# Altium PCB SAW-TOOTH-DAC0808.PcbDoc
Units mm, origin at the board's own origin, x right, y up, seen from the top; angles counter-clockwise.
Board outline 119.51 x 37.72 mm, 2 copper layers (Top Layer, Bottom Layer); 20 components, 23 nets, 91 pads, 12 vias.
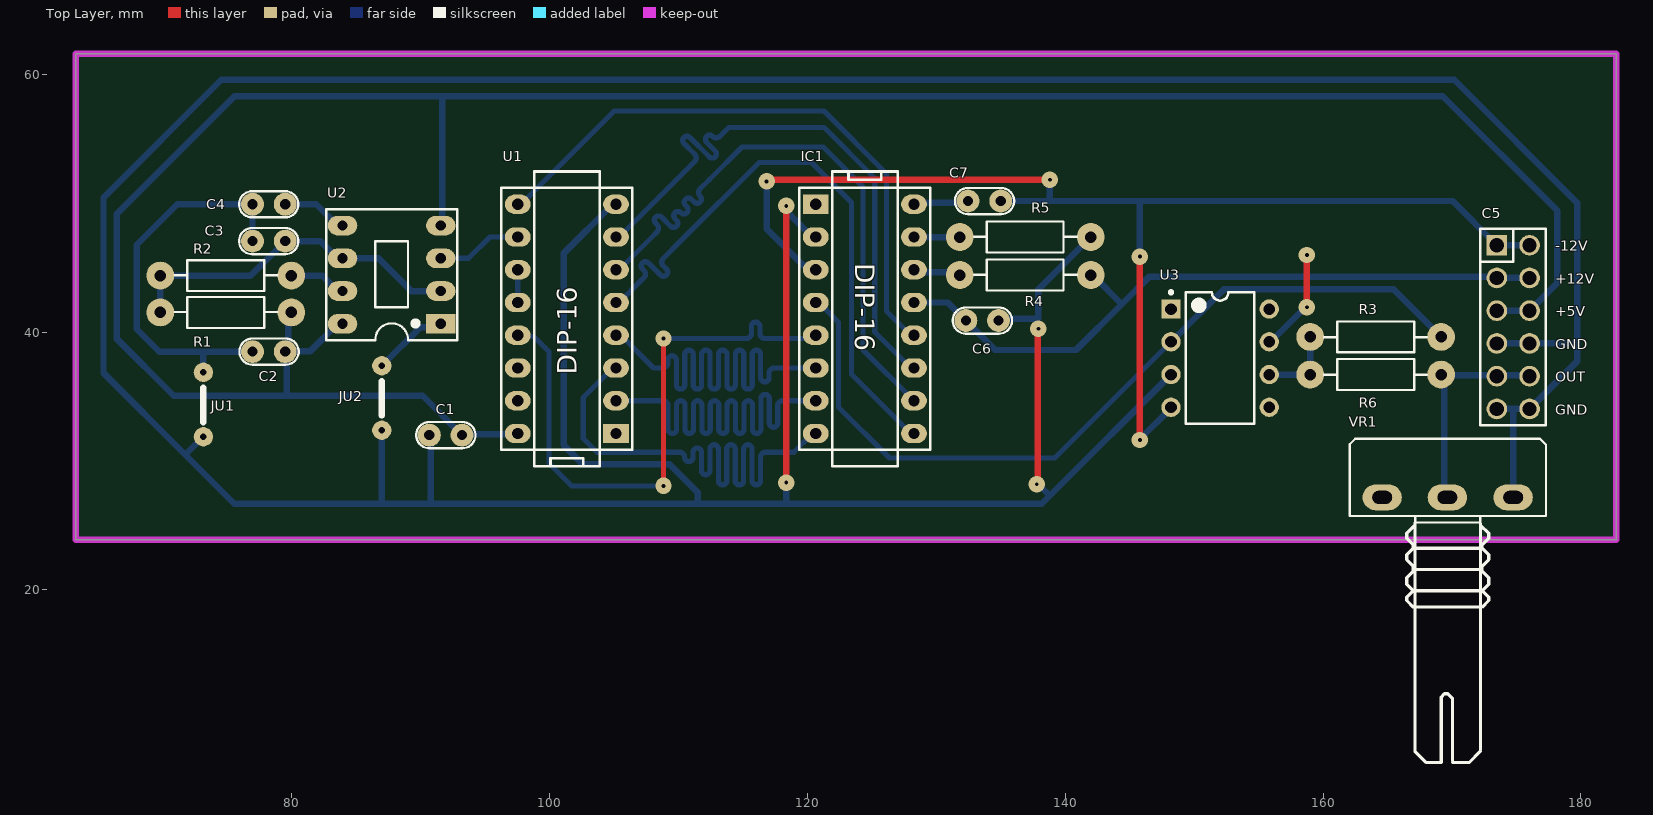
[diagram p0: Top Layer view]
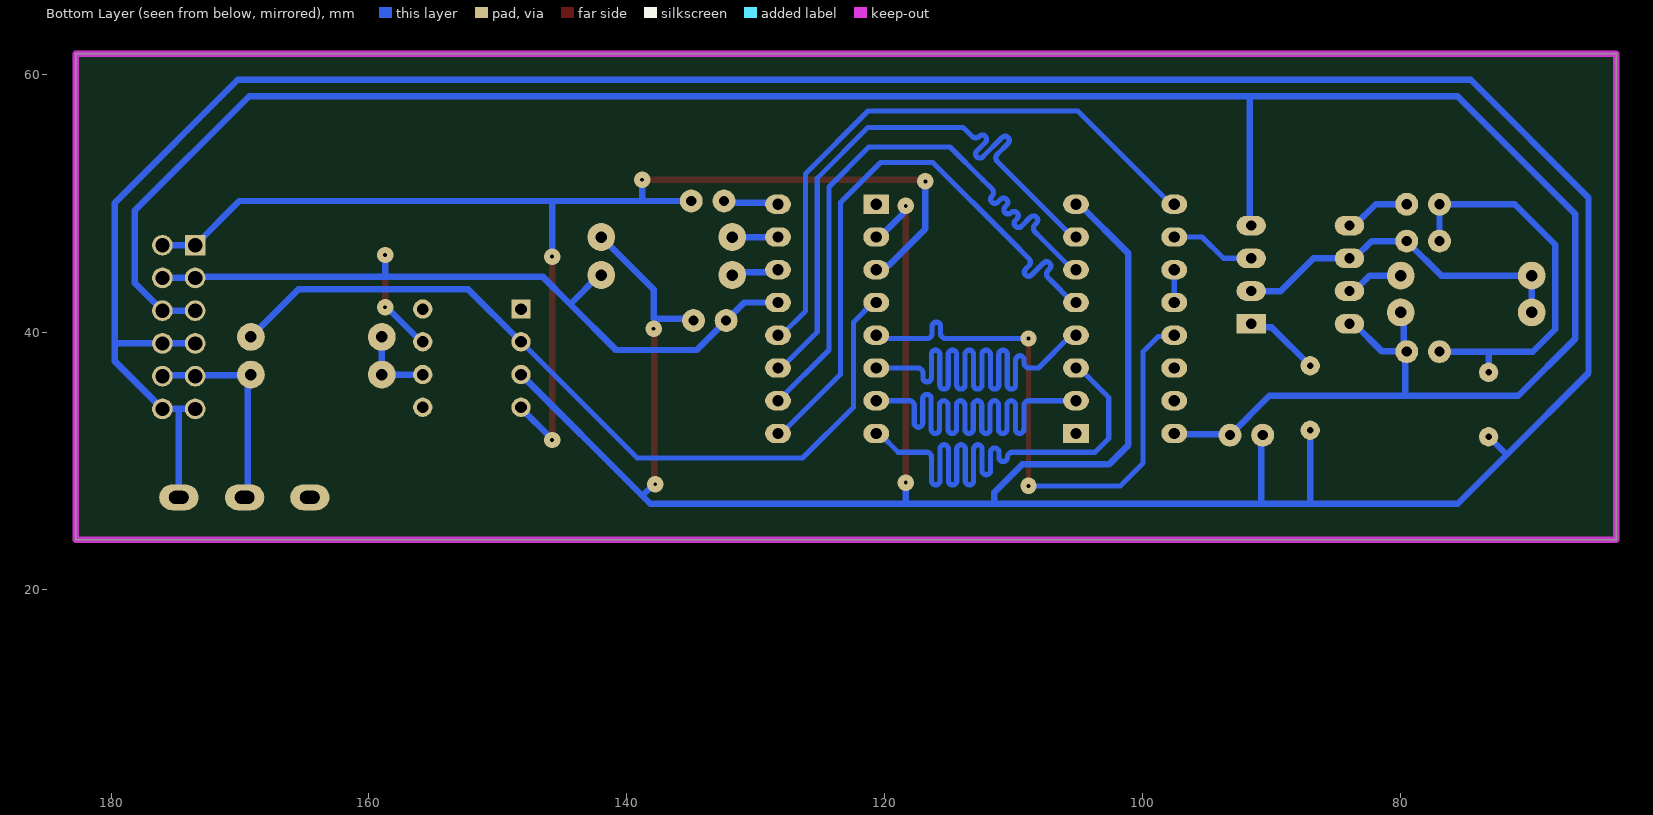
[diagram p1: Bottom Layer view, seen from below]
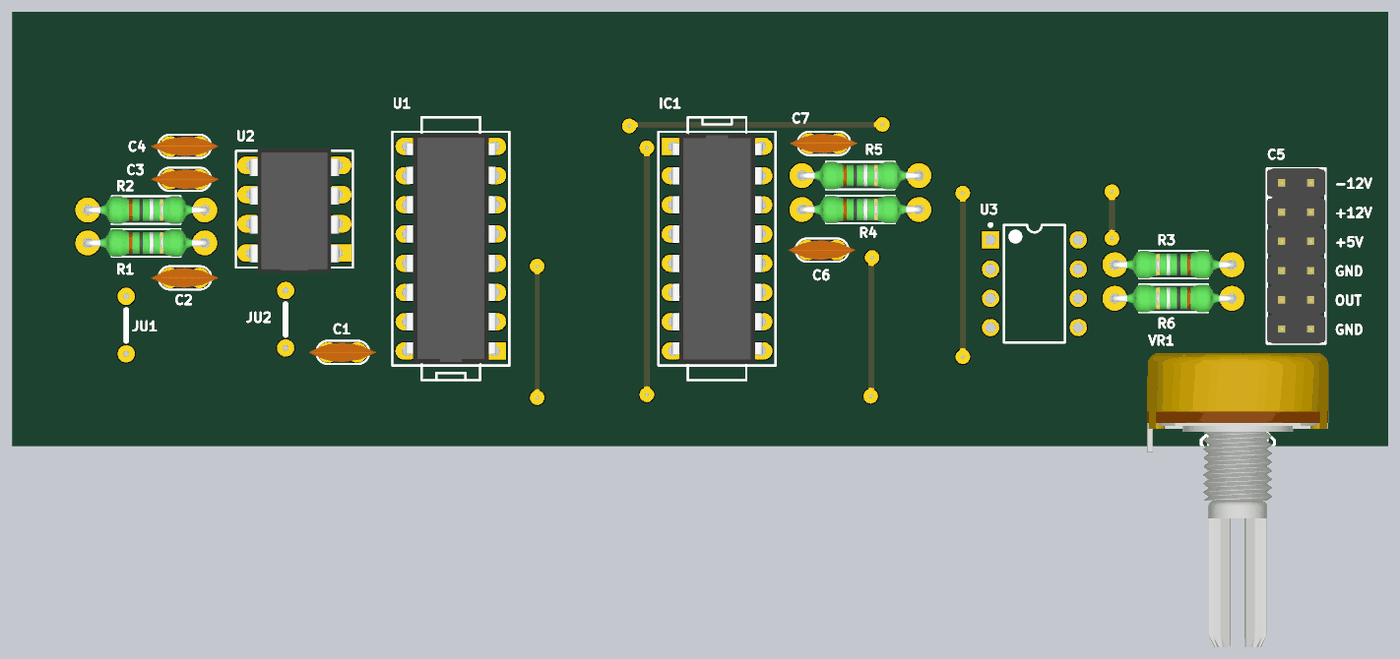
[diagram p2: 3D render of the assembled board from above, using the file's embedded part models]

## Layer stack, top to bottom
Top Solder: solder mask 0.0102, Solder Resist, Dk 3.5
Top Layer: signal copper 0.0356
Dielectric 1: dielectric 0.32, FR-4, Dk 4.8
Bottom Layer: signal copper 0.0356
Bottom Solder: solder mask 0.0102, Solder Resist, Dk 3.5

## Board outline
63.246,23.876 63.246,61.595 182.753,61.595 182.753,23.876

## Design rules (kind name [scope] priority, off if disabled: settings)
Clearance [All] p1: gap=0.5 ignorepadtopadclearanceinfootprint=FALSE
MatchedLengths "Schematic Matched Net Lengths" [InNetClass('BIT')] p1: tolerance=0.2 checknetsindiffpair=FALSE checkdiffpairvsdiffpair=TRUE checkxsignals=TRUE checkothers=TRUE
PolygonConnect [All] p1: connectstyle=Relief reliefconductorwidth=0.254 reliefentries=4 polygonreliefangle="90 Angle" airgapwidth=0.254
RoutingVias [All] p1: holewidth=0.3 width=1.27 viastyle="Through Hole" minholewidth=0.3 minwidth=1.27 maxholewidth=0.3 maxwidth=1.27
SolderMaskExpansion [All] p1: expansion=0.102 istentingtop=FALSE
Width [All] p1: maxlimit=1 minlimit=0.4 preferedwidth=0.5
30 further rules are at their usual default settings.

## Classes and differential pairs
net class BIT: BIT0 BIT1 BIT2 BIT3 BIT4 BIT5 BIT6 BIT7

## Components (designator, comment, footprint, x,y, rotation, side; value= is the part's Value field where it differs from the comment)
C1 "100nF" CN1 91.948,32.004 r0 top value=33pF
C2 "100nF" CN1 78.235,38.481 r0 top value=33pF
C3 "1nF" CN1 78.232,47.053 r180 top value=33pF
C4 "100nF" CN1 78.232,49.911 r180 top value=33pF
C5 "JP6x2" JP6-D2T 174.752,40.386 r270 top
C6 "100nF" CN1 133.566,40.894 r0 top value=33pF
C7 "100nF" CN1 133.731,50.165 r0 top value=33pF
IC1 "DAC0808" DIP16 124.462,41.014 r270 top
JU1 "JUMPER 5MM" "JUMPER 5MM" 73.152,31.877 r90 top
JU2 "JUMPER 5MM" "JUMPER 5MM" 86.995,32.385 r90 top
R1 "1K2" RES-1/4W 74.511,41.65 r180 top
R2 "2K2" RES-1/4W 74.511,44.507 r180 top
R3 "5K1" RES-1/4W 164.465,39.497 r0 top
R4 "5K1" RES-1/4W 136.525,44.55 r180 top
R5 "1K" RES-1/4W 136.525,47.498 r180 top
R6 "1K" RES-1/4W 164.465,36.576 r0 top
U1 "4040" DIP16 101.344,41.028 r90 top
U2 "NE555" DIP8 87.757,44.323 r90 top
U3 "TL071CP" P0008A 152.019,37.973 r0 top
VR1 "10K" VR-S1 169.672,27.178 r0 top value="Volume 50k"

## Footprints (in the part's own frame and the unit in brackets; to place one, negate y for a bottom-side part, rotate by r counter-clockwise, add the part's x,y. Pads: shape width x height; smd on the part's side, far side on the other; paste and mask are expansions set on the pad)
CN1 [mil]
  round 70 hole 31: 1(-50,0) 2(50,0)
  silkscreen extent -90,-40 91,40, body extent -115,-33 115,33, height 265
DIP8 [mil] "DIP, 8-Leads, Row Spacing 7.62mm, Pitch 2.54mm, Body 9.91x6.73mm"
  rect 60x90 hole 31: 1(-145,-150)
  oval 60x90 hole 31: 2(-45,-150) 3(55,-150) 4(155,-150) 5(155,150) 6(55,150) 7(-45,150) 8(-145,150)
  silkscreen extent -195,-200 205,200, body extent -213,-153 213,153, height 177
DIP16 [mm]
  rect 1.5x2 hole 0.864: 1(-8.897,-3.812)
  oval 1.5x2 hole 0.864: 2(-6.357,-3.812) 3(-3.817,-3.812) 4(-1.277,-3.812) 5(1.263,-3.812) 6(3.803,-3.812) 7(6.343,-3.812) 8(8.883,-3.812) 9(8.883,3.808) 10(6.343,3.808) 11(3.803,3.808) 12(1.263,3.808) 13(-1.277,3.808) 14(-3.817,3.808) 15(-6.357,3.808) 16(-8.897,3.808)
  silkscreen extent -11.44,-5.08 11.42,5.08, body extent -10,-3.93 10,3.94, height 1.99
JP6-D2T [mm] "12 pins, dual pin, straight, gold plating"
  rect 1.6x1.6 hole 1.1: 1(-6.35,-1.27)
  round 1.6 hole 1.1: 2(-3.81,-1.27) 3(-1.27,-1.27) 4(1.27,-1.27) 5(3.81,-1.27) 6(6.35,-1.27) 7(6.35,1.27) 8(3.81,1.27) 9(1.27,1.27) 10(-1.27,1.27) 11(-3.81,1.27) 12(-6.35,1.27)
  silkscreen extent -7.62,-2.54 7.62,2.54, body extent -7.62,-2.54 7.62,2.54, height 8.55
"JUMPER 5MM" [mm]
  round 1.5 hole 0.5: 1(0,0) 2(5,0)
  silkscreen extent 1.14,0 3.81,0
P0008A [mm] "DIP, 8-Leads, Body 10.15x6.6mm, Pitch 2.54mm"
  rect 1.5x1.5 hole 0.9: 1(-3.81,3.81)
  round 1.5 hole 0.9: 2(-3.81,1.27) 3(-3.81,-1.27) 4(-3.81,-3.81) 5(3.81,-3.81) 6(3.81,-1.27) 7(3.81,1.27) 8(3.81,3.81)
  silkscreen extent -3.93,-5.1 2.65,5.23, body extent -3.95,-5.07 3.95,5.07, height 5.08
RES-1/4W [mil]
  round 85 hole 35: 1(-215,5) 2(185,5)
  silkscreen extent -173,-42 141,52, body extent -227,-42 197,52, height 95
VR-S1 [mil]
  oval 120x78.74 hole 40 slot 60 at 0 deg: 1(-200,0) 2(-1,0) 3(200,0)
  silkscreen extent -299,-810 300,179, body extent -310,-818 310,188, height 839

## Part data
C1 C2 C3 C4 C6 C7: library part CN
C5: "WR-PHD 2.54 mm Dual Socket Header", Manufacturer="W¨¹rth Elektronik eiSos GmbH", partNo=61301221821, ComponentLink1 Description=Manufacturer, ComponentLink1URL=http://www.we-online.com, ComponentLink2 Description=Datasheet, ComponentLink2URL=http://katalog.we-online.de/em/datasheet/6130xx21821.pdf, Created by="Karrer Zheng", Created Date="29 March 2013", NoPins=12
IC1: "8 Bits Digital Analog Convert"
R1 R2 R3 R4 R5 R6: library part Res, "Res", Manufacturer="Generic Components", Class=Passive, Published=08/06/2000, Publisher="Altium Hobart Technology Centre", SubClass=R
U1: "ASYNCHRONOUS 12-BIT BINARY COUNTERS"
U2: "TIMER IC", Current=200mA, Frequency=500kHz, Manufacturer=STMicroelectronics, Manufacturer Part Number=NE555DT, Operating Temperature="0°C ~ 70°C", Package / Case="8-SOIC (3.9mm Width)", Supplier Part Number=497-1962-2-ND, Voltage - Supply="4.5 V ~ 16 V", Category="Integrated Circuits (ICs)", Count=-, Packaging="Tape & Reel (TR)", RoHS="RoHS Compliant", Supplier=Digi-Key, Supplier 1=Digi-Key, Supplier Part Number 1=497-1962-2-ND, Type="555 Type, Timer/Oscillator (Single)"
U3: library part CMP-0017-00972-2, "Low-Noise JFET-Input General-Purpose Operational Amplifier, 7 to 36 V, 0 to 70 degC, 8-pin DIP (P8), Pb-Free (RoHS)", Manufacturer="Texas Instruments", Rating=Military, Total Supply Voltage(Max)(+5V is 5, +/-5V is 10)=36, Total Supply Voltage(Min)(+5V is 5, +/-5V is 10)=7, CMRR(Min)(dB)=70, Code_JEDEC=MS-001, ComponentLink1Description="Manufacturer URL", ComponentLink1URL=http://www.ti.com/, ComponentLink2Description=Datasheet, ComponentLink2URL=http://www.ti.com/lit/ds/symlink/tl071.pdf, ComponentLink3Description="Package Specification", ComponentLink3URL=http://www.ti.com/litv/pdf/mpdi001b, DatasheetVersion=SLOS080J, Eco-Plan="Pb-Free (RoHS)", GBW(Typ)(MHz)=3, IIB(Max)(pA)=200, Iq per channel(Max)(mA)=2.5, Mounting Technology="Through Hole", Number of Channels=1, Offset Drift(Typ)(uV/C)=18, PackageDescription="8-Pin Plastic In-Line, Body 9.59 x 6.35 mm, Pitch 2.54 mm", PackageReference=P0008A, PackageVersion="4040082/E, 04/2010", PartNumber=TL071CP, Slew Rate(Typ)(V/us)=13, Sub Family="General Purpose Amplifier, High Supply Voltage Amplifier (>=30V)", Vio (25C)(Max)(mV)=10, Vn at 1kHz(Typ)(nV/rtHz)=18
VR1: library part VR-S, "Var Resistor"

## Via types
v1: diameter 1.27, hole 0.3, Top Layer to Bottom Layer, 12 vias

## Nets (pads, with @x,y where several pads share a name; then routed paths per layer and width w, separated by ;. In a path a pad name is that pad's centre, name@x,y a point inside that pad or via, vN(x,y) a via of type N, cw(c..) or ccw(c..) an arc to the next point about the centre after c; other vN are vias at no path point)
5V: C1.2 C2.2 C5.3 C5.10 R1.1 U1.16 U2.4 U2.8 | length 196.5
  Bottom Layer w0.5: R1.1 79.738,41.289 79.738,38.714 C2.2@79.519,38.495 ; U2.8 83.566,40.64 81.421,38.495 79.738,38.495 C2.2@79.519,38.495 ; U2.4 91.694,48.387 91.694,58.293 ; U1.16 97.472,32.067 93.281,32.067 C1.2 90.17,35.052 79.629,35.052 ; C5.3 C5.10 178.181,43.815 178.181,49.403 169.291,58.293 91.694,58.293 ; C2.2@79.519,38.495 C2.2 79.629,38.357 79.629,35.052 ; 79.629,35.052 70.866,35.052 66.421,39.497 66.421,49.149 75.565,58.293 91.694,58.293
+12V: C5.2 C5.11 C6.1 IC1.13 R4.1 U3.7 | length 64.8
  Top Layer w0.5: v1(158.75,41.922) v1(158.75,45.974)
  Bottom Layer w0.5: IC1.13 130.899,42.291 C6.1 134.582,38.608 140.843,38.608 144.399,42.164 ; R4.1 142.14,44.423 144.399,42.164 ; U3.7 155.95,39.243 158.629,41.922 v1(158.75,41.922) ; v1(158.75,45.974) 158.75,44.307 ; C5.11 C5.2 173.371,44.307 158.75,44.307 ; 144.399,42.164 146.542,44.307 158.75,44.307
-12V: C5.1 C5.12 C7.2 IC1.3 U3.4 | length 96.8
  Top Layer w0.5: v1(116.84,51.689) 116.955,51.804 138.799,51.804 v1(138.811,51.816) ; v1(145.796,31.623) v1(145.796,45.847)
  Bottom Layer w0.5: v1(116.84,51.689) 116.84,48.006 119.647,45.199 119.761,45.199 120.129,44.831 IC1.3 ; C7.2 145.796,50.165 ; 138.811,50.419 v1(138.811,51.816) ; v1(145.796,31.623) 145.796,31.686 148.209,34.099 U3.4 ; v1(145.796,45.847) 145.796,50.165 ; C5.12 C5.1 170.053,50.165 145.796,50.165
BIT0: IC1.12 U1.9 | length 47.2
  Bottom Layer w0.4: U1.9 97.786,49.911 105.025,57.15 121.288,57.15 126.128,52.31 126.128,41.643 128.02,39.751 IC1.12
BIT1: IC1.11 U1.7 | length 47.2
  Bottom Layer w0.4: U1.7 105.406,47.371 111.123,53.088 111.264,53.229 ccw(c110.982,53.512) 111.264,53.795 110.427,54.633 cw(c110.658,54.864) 110.427,55.095 cw(c110.658,54.864) 110.889,55.095 112.392,53.593 ccw(c112.623,53.824) 112.854,53.593 ccw(c112.623,53.824) 112.854,54.055 112.189,54.72 cw(c112.421,54.951) 112.189,55.182 cw(c112.421,54.951) 112.652,55.182 ccw(c112.935,55.465) 113.217,55.182 113.915,55.88 115.951,55.88 121.285,55.88 125.228,51.937 125.228,40.003 128.02,37.211 IC1.11
BIT2: IC1.10 U1.6 | length 47.1
  Bottom Layer w0.4: U1.6 105.406,44.831 108.202,47.627 108.343,47.768 ccw(c108.061,48.051) 108.343,48.334 108.224,48.454 cw(c108.455,48.685) 108.224,48.916 cw(c108.455,48.685) 108.686,48.916 109.396,48.207 ccw(c109.627,48.438) 109.858,48.207 ccw(c109.627,48.438) 109.858,48.669 109.732,48.795 cw(c109.963,49.026) 109.732,49.258 cw(c109.963,49.026) 110.195,49.258 ; 110.195,49.257 ccw(c110.426,49.489) 110.657,49.257 ccw(c110.426,49.489) 110.657,49.72 110.544,49.833 cw(c110.776,50.064) 110.544,50.295 cw(c110.776,50.064) 111.007,50.295 111.221,50.081 ccw(c111.453,50.312) 111.684,50.081 ccw(c111.453,50.312) 111.684,50.543 cw(c111.967,50.826) 111.684,51.109 112.393,51.818 114.931,54.356 121.231,54.356 124.328,51.26 124.328,38.613 IC1.10
BIT3: IC1.9 U1.5 | length 47.2
  Bottom Layer w0.4: U1.5 105.406,42.291 107.186,44.071 107.327,44.212 ccw(c107.045,44.495) 107.327,44.778 107.208,44.898 cw(c107.439,45.129) 107.208,45.36 cw(c107.439,45.129) 107.67,45.36 108.61,44.421 ccw(c108.841,44.652) 109.072,44.421 ccw(c108.841,44.652) 109.072,44.883 108.818,45.137 cw(c109.101,45.42) 108.818,45.703 110.171,47.055 116.266,53.151 120.331,53.151 123.428,50.054 123.428,36.723 128.02,32.131 IC1.9
BIT4: IC1.8 U1.3 | length 47.2
  Bottom Layer w0.4: U1.3 104.906,37.211 102.616,34.921 102.616,31.75 103.685,30.681 109.347,30.681 110.081,30.681 cw(c110.081,30.281) 110.481,30.281 ccw(c110.808,30.281) 111.135,30.281 111.135,30.681 cw(c111.462,30.681) 111.789,30.681 111.789,29.256 ccw(c112.116,29.256) 112.443,29.256 112.443,30.932 cw(c112.77,30.932) 113.097,30.932 113.097,28.468 ccw(c113.424,28.468) 113.751,28.468 113.751,30.932 cw(c114.078,30.932) 114.405,30.932 114.405,28.468 ccw(c114.732,28.468) 115.059,28.468 115.059,30.932 cw(c115.386,30.932) 115.713,30.932 115.713,28.468 ccw(c116.04,28.468) 116.367,28.468 116.367,30.281 cw(c116.767,30.281) 116.767,30.681 116.967,30.681 118.95,30.681 120.4,32.131 IC1.8
BIT5: IC1.7 U1.2 | length 47.1
  Bottom Layer w0.4: U1.2 107.95,34.671 108.804,34.671 cw(c108.804,34.271) 109.204,34.271 109.204,32.458 ccw(c109.531,32.458) 109.858,32.458 109.858,34.344 cw(c110.185,34.344) 110.512,34.344 110.512,32.458 ccw(c110.839,32.458) 111.166,32.458 111.166,34.344 cw(c111.493,34.344) 111.82,34.344 111.82,32.458 ccw(c112.147,32.458) 112.474,32.458 112.474,34.344 cw(c112.801,34.344) 113.128,34.344 113.128,32.458 ccw(c113.455,32.458) 113.782,32.458 113.782,34.344 cw(c114.109,34.344) 114.436,34.344 114.436,32.458 ccw(c114.763,32.458) 115.09,32.458 115.09,34.344 cw(c115.417,34.344) 115.744,34.344 115.744,32.458 ccw(c116.071,32.458) 116.398,32.458 116.398,34.838 cw(c116.725,34.838) 117.052,34.838 117.052,32.945 ccw(c117.379,32.945) 117.706,32.945 117.706,34.271 cw(c118.106,34.271) 118.106,34.671 120.269,34.671 IC1.7
BIT6: IC1.6 U1.4 | length 47.1
  Bottom Layer w0.4: U1.4 105.537,39.751 108.077,37.211 108.585,37.211 108.785,37.211 ccw(c108.785,37.611) 109.185,37.611 109.185,37.835 cw(c109.512,37.835) 109.839,37.835 109.839,35.898 ccw(c110.166,35.898) 110.493,35.898 110.493,38.27 cw(c110.82,38.27) 111.147,38.27 111.147,35.898 ccw(c111.474,35.898) 111.801,35.898 111.801,38.27 cw(c112.128,38.27) 112.455,38.27 112.455,35.898 ccw(c112.782,35.898) 113.109,35.898 113.109,38.27 cw(c113.436,38.27) 113.763,38.27 113.763,35.898 ccw(c114.09,35.898) 114.417,35.898 114.417,38.27 cw(c114.744,38.27) 115.071,38.27 115.071,35.898 ccw(c115.398,35.898) 115.725,35.898 115.725,38.27 cw(c116.052,38.27) 116.379,38.27 116.379,36.462 ccw(c116.706,36.462) 117.033,36.462 117.033,36.811 cw(c117.433,36.811) 117.433,37.211 118.999,37.211 IC1.6
BIT7: IC1.5 U1.13 | length 46.5
  Top Layer w0.4: v1(108.839,28.067) v1(108.839,39.497)
  Bottom Layer w0.4: U1.13 97.644,39.643 98.787,39.643 99.949,38.481 99.949,29.845 101.727,28.067 v1(108.839,28.067) ; v1(108.839,39.497) 115.062,39.497 115.262,39.497 ccw(c115.262,39.897) 115.662,39.897 115.662,40.445 cw(c115.989,40.445) 116.316,40.445 116.316,39.897 ccw(c116.716,39.897) 116.716,39.497 118.491,39.497 120.396,39.497 IC1.5
CLK: U1.10 U2.3 | length 6.7
  Bottom Layer w0.4: U2.3 93.726,45.72 95.377,47.371 U1.10
GND: C1.1 C2.1 C3.2 C4.2 C5.4 C5.6 C5.7 C5.9 C6.2 IC1.2 JU1.1 JU1.2 JU2.1 JU2.2 R5.1 U1.8 U2.1 U3.3 VR1.3 | length 394.7
  Top Layer w0.5: v1(118.364,28.321) v1(118.364,49.784) ; v1(137.795,28.194) 137.858,28.258 137.858,40.195 v1(137.922,40.259)
  Bottom Layer w0.5: JU1.1 71.755,30.48 ; JU1.2 73.152,38.481 ; C3.2 C4.2 71.12,49.911 67.982,46.773 67.982,40.222 69.723,38.481 73.152,38.481 ; C2.1 73.152,38.481 ; JU2.1 87.122,32.258 86.995,32.131 86.995,26.682 ; JU2.2 89.967,40.357 91.284,40.357 U2.1 ; C1.1 90.805,31.877 90.805,26.682 ; U1.8 104.906,49.911 101.092,46.097 101.092,31.242 102.603,29.731 109.334,29.731 111.506,27.559 111.506,26.809 111.633,26.682 ; v1(118.364,28.321) 118.364,26.682 ; v1(118.364,49.784) 118.511,49.637 118.511,49.239 120.379,47.371 IC1.2 ; C6.2 134.963,41.021 137.922,41.021 137.922,43.307 R5.1 ; v1(137.795,28.194) 137.922,28.194 138.811,27.305 ; U3.3 138.811,27.305 ; C5.6 174.752,34.036 ; C5.4 C5.9 179.705,39.116 ; VR1.3 174.752,34.036 ; 71.755,30.48 75.553,26.682 86.995,26.682 ; 71.755,30.48 65.405,36.83 65.405,50.419 74.549,59.563 170.18,59.563 179.705,50.038 179.705,39.116 ; 86.995,26.682 90.805,26.682 ; 90.805,26.682 111.633,26.682 ; 111.633,26.682 118.364,26.682 ; 118.364,26.682 138.188,26.682 138.811,27.305 ; 174.752,34.036 C5.7 179.705,37.719 179.705,39.116
NetC3_1: C3.1 R1.2 R2.2 U2.2 U2.6 | length 27.3
  Bottom Layer w0.5: R1.2 R2.2 76.829,44.38 C3.1 82.233,47.053 83.566,45.72 U2.6 86.741,45.72 89.281,43.18 U2.2
NetC4_1: C4.1 U2.5 | length 5.1
  Bottom Layer w0.5: C4.1 81.915,49.911 83.566,48.26 U2.5
NetC7_1: C7.1 IC1.16 | length 4.3
  Bottom Layer w0.5: IC1.16 128.397,50.038 132.334,50.038 C7.1
NetIC1_4: IC1.4 R3.2 U3.2 | length 64.3
  Bottom Layer w0.4: IC1.4 120.9,42.291 122.428,40.763 122.428,34.163 126.365,30.226 139.192,30.226 U3.2
  Bottom Layer w0.5: U3.2 148.23,39.243 152.294,43.307 165.481,43.307 R3.2
NetIC1_14: IC1.14 R4.2 | length 3.7
  Bottom Layer w0.5: IC1.14 128.461,44.64 131.609,44.64 R4.2
NetIC1_15: IC1.15 R5.2 | length 4.1
  Bottom Layer w0.5: IC1.15@128.461,47.562 IC1.15 R5.2 R5.2@131.621,47.166
NetR2_1: R2.1 U2.7 | length 4.5
  Bottom Layer w0.5: R2.1 82.366,44.38 83.566,43.18 U2.7
NetR3_1: R3.1 R6.1 U3.6 | length 6.1
  Bottom Layer w0.5: U3.6 R6.1 R3.1
NetU1_11: U1.11 U1.12 | length 2.5
  Bottom Layer w0.4: U1.12 U1.11
SAW-TOOTH: C5.5 C5.8 R6.2 VR1.2 | length 16.5
  Bottom Layer w0.5: R6.2 R6.2@169.227,36.639 ; VR1.2 169.405,27.419 169.405,36.462 R6.2@169.227,36.639 ; C5.8 175.958,36.639 R6.2@169.227,36.639
pads on no net: IC1.1 U1.1 U1.14 U1.15 U3.1 U3.5 U3.8 VR1.1

## Keep-outs
Keep-Out Layer:
  the board outline again, w0.5

## Silkscreen, mask and mechanical layers (free items; w line width, h text height)
Top Overlay:
  text "-12V" at 178,46.301 h0.8
  text "+12V" at 178,43.761 h0.8
  text "+5V" at 178,41.221 h0.8
  text "GND" at 178,38.681 h0.8
  text "OUT" at 178,36.141 h0.8
  text "GND" at 178,33.601 h0.8

## Text inside footprints (layer, text, board x,y; h text height)
IC1: Top Overlay "DIP-16" at 123.698,45.339 h1.5 r270
U1: Top Overlay "DIP-16" at 102.108,36.703 h1.5 r90